# Allegro board demob2.brd
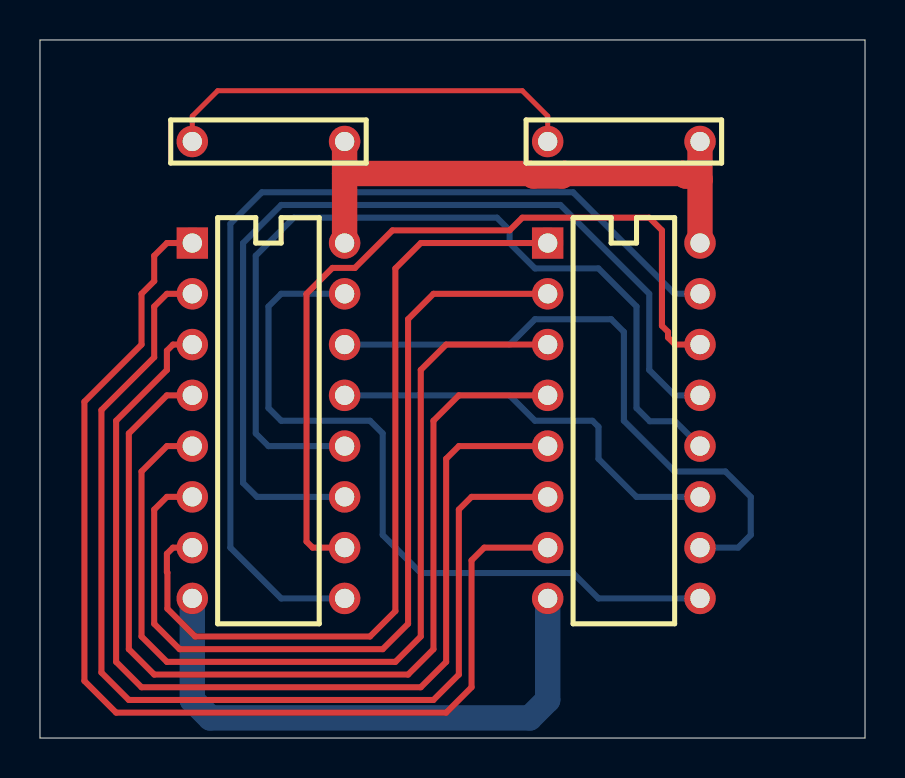
[diagram p0: board, top side]
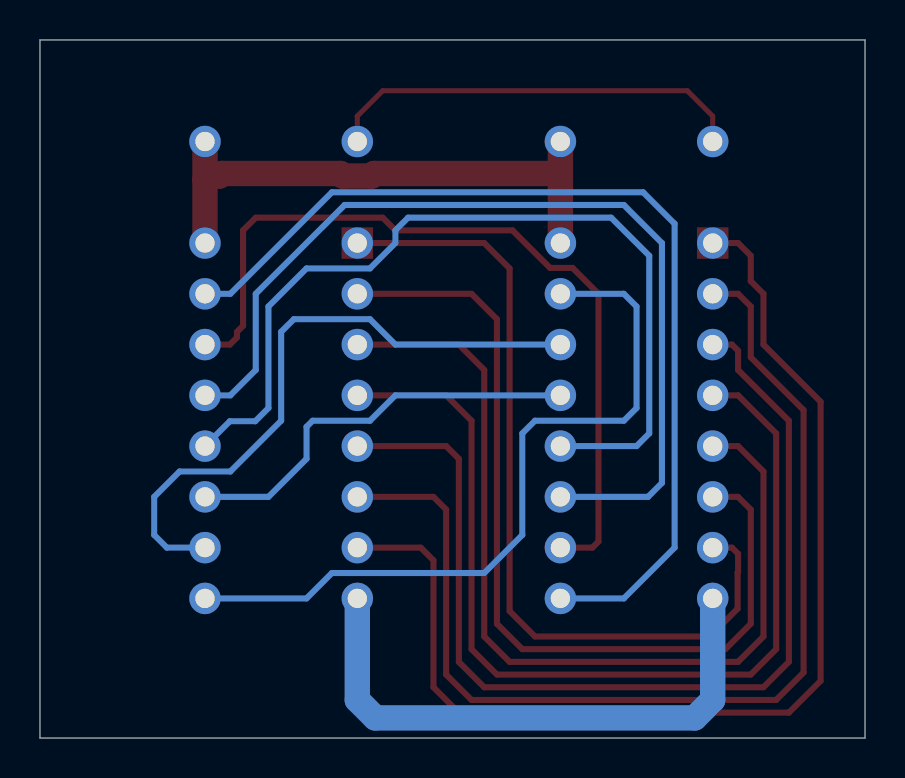
[diagram p1: board, bottom side, seen from below]

Outline 41.27 x 34.93 mm; copper layers: TOP, GND, POWER, INNER1, INNER2, BOTTOM. Coordinates in mm from the lower left corner of the outline.
Outline path: 0,34.93 41.27,34.93 41.27,0 0,0 0,34.93

## Design rules (mm)
nets with their own width: min track width 0.254; nets GND_SIGNAL
nets with their own width: min track width 0.305; nets N01899 N01900 N01901 N01902 N01903 N01904 N01905 N01906 N01907 N01908 N01909 N01910 N01911 N01912
nets with their own width: min track width 1.27; nets GND VCC

## Placement (name value [footprint] x y rotation side)
C1  CAP NP  [AC300100A]  15.24 29.85 180 top
C2  CAP NP  [AC300100A]  33.02 29.85 180 top
U1  74LS158  [DIP16]  7.62 24.77 270 top
U2  74LS158  [DIP16]  25.4 24.77 270 top

## Library data of the parts
C1 C2 = CAP_NP
U1 U2 = 74LS158

## Footprints (pads in the part's own frame, mm; a bottom-side part is the same pattern mirrored in y, then rotated)
AC300100A
  round 1.575 hole 0.965: 1(0,0) 2(7.62,0)
DIP16
  rect 1.575x1.575 hole 0.965: 1(0,0)
  round 1.575 hole 0.965: 2(2.54,0) 3(5.08,0) 4(7.62,0) 5(10.16,0) 6(12.7,0) 7(15.24,0) 8(17.78,0) 9(17.78,7.62) 10(15.24,7.62) 11(12.7,7.62) 12(10.16,7.62) 13(7.62,7.62) 14(5.08,7.62) 15(2.54,7.62) 16(0,7.62)

## Nets
GND: U1.8(TP-8) U2.8(TP-8)
GND_SIGNAL: C1.2(TP-2) C2.2(TP-2)
VCC: C1.1(TP-1) C2.1(TP-1) U1.16(TP-16) U2.16(TP-16)
N01899: U1.2(TP-2) U2.6(TP-6)
N01900: U1.3(TP-3) U2.5(TP-5)
N01901: U1.4(TP-4) U2.4(TP-4)
N01902: U1.5(TP-5) U2.3(TP-3)
N01903: U1.6(TP-6) U2.2(TP-2)
N01904: U1.7(TP-7) U2.1(TP-1)
N01905: U1.9(TP-9) U2.15(TP-15)
N01906: U1.10(TP-10) U2.14(TP-14)
N01907: U1.11(TP-11) U2.13(TP-13)
N01908: U1.12(TP-12) U2.12(TP-12)
N01909: U1.14(TP-14) U2.10(TP-10)
N01910: U1.1(TP-1) U2.7(TP-7)
N01911: U1.13(TP-13) U2.11(TP-11)
N01912: U1.15(TP-15) U2.9(TP-9)

## Via types
v1: diameter 0.61, hole 0.33, TOP to BOTTOM, 1 via

## Routing (per net, layer and track width the routed paths; a pad name or vN(x,y) marks a point on that pad's centre or on a via; arc(x,y) is an arc through that point)
GND: length 28.7
  BOTTOM w1.27: v1(7.62,6.99) 7.62,1.91 8.52,1.01 24.5,1.01 25.4,1.91 U2.8
GND_SIGNAL: length 21.4
  TOP w0.254: C1.2 7.62,31.11 8.89,32.39 24.13,32.39 25.4,31.11 C2.2
VCC: length 28.2
  TOP w1.27: 15.24,28.24 24.56,28.24 24.68,28.12 26.12,28.12 26.24,28.24 32.18,28.24 32.3,28.12 32.84,28.12 33.02,27.94 ; 15.24,28.24 U1.16 ; 15.24,28.24 C1.1 ; 33.02,27.94 C2.1 ; 33.02,27.94 U2.16
N01899: length 53.5
  TOP w0.305: U2.6 21.59,12.07 20.95,11.43 20.95,3.17 19.68,1.91 4.45,1.91 3.07,3.28 3.07,16.41 5.71,19.05 5.71,21.59 6.35,22.22 U1.2
N01900: length 51.1
  TOP w0.305: U2.5 20.95,14.61 20.32,13.97 20.32,3.81 19.05,2.54 5.08,2.54 3.81,3.81 3.81,15.88 6.35,18.41 6.35,19.38 6.65,19.68 U1.3
N01901: length 48.7
  TOP w0.305: U1.4 6.35,17.14 4.45,15.24 4.45,4.45 5.71,3.17 18.41,3.17 19.68,4.45 19.68,15.88 20.95,17.14 U2.4
N01902: length 46.6
  TOP w0.305: U1.5 6.35,14.61 5.08,13.34 5.08,5.08 6.35,3.81 17.78,3.81 19.05,5.08 19.05,18.41 20.32,19.68 U2.3
N01903: length 44.4
  TOP w0.305: U1.6 6.35,12.07 5.71,11.43 5.71,5.72 6.99,4.45 17.14,4.45 18.41,5.72 18.41,20.95 19.68,22.22 U2.2
N01904: length 42
  TOP w0.305: U1.7 6.65,9.52 6.35,9.22 6.35,8.31 6.38,8.28 6.38,6.47 7.76,5.08 16.51,5.08 17.78,6.35 17.78,23.5 19.05,24.77 U2.1
N01905: length 49.2
  BOTTOM w0.305: U2.15 31.75,22.22 26.67,27.3 11.1,27.3 9.53,25.73 9.53,9.52 12.06,6.99 U1.9
N01906: length 41.3
  TOP w0.305: U1.10 13.64,9.52 13.34,9.83 13.34,22.22 14.63,23.52 15.76,23.52 17.64,25.4 23.5,25.4 24.13,26.04 30.48,26.04 31.11,25.4 31.11,20.62 31.42,20.32 31.42,20.04 31.78,19.68 U2.14
N01907: length 47.2
  BOTTOM w0.305: U1.11 10.86,12.07 10.16,12.76 10.16,24.77 12.06,26.67 26.04,26.67 30.48,22.22 30.48,18.41 31.75,17.14 U2.13
N01908: length 44.7
  BOTTOM w0.305: U1.12 11.43,14.61 10.79,15.24 10.79,24.13 12.7,26.04 22.86,26.04 23.5,25.4 23.5,24.77 24.77,23.5 27.94,23.5 29.84,21.59 29.84,16.51 30.51,15.85 31.78,15.85 U2.12
N01909: length 31.8
  BOTTOM w0.305: U2.10 34.92,9.52 35.56,10.16 35.56,12.07 34.29,13.34 31.75,13.34 29.21,15.88 29.21,20.32 28.57,20.95 24.77,20.95 23.5,19.68 U1.14
N01910: length 55.9
  TOP w0.305: U1.1 6.35,24.77 5.71,24.13 5.71,22.86 5.08,22.22 5.08,19.68 2.22,16.83 2.22,2.86 3.81,1.27 20.32,1.27 21.59,2.54 21.59,8.89 22.23,9.52 U2.7
N01911: length 20.8
  BOTTOM w0.305: U2.11 29.84,12.07 27.94,13.97 27.94,15.57 27.64,15.88 24.77,15.88 23.5,17.14 U1.13
N01912: length 37.7
  BOTTOM w0.305: U2.9 27.94,6.99 26.67,8.25 19.05,8.25 17.14,10.16 17.14,15.24 16.51,15.88 12.06,15.88 11.43,16.51 11.43,21.59 12.06,22.22 U1.15
